# EAGLE board l-drv_h2-smd-001 (EAGLE 7.2.0)
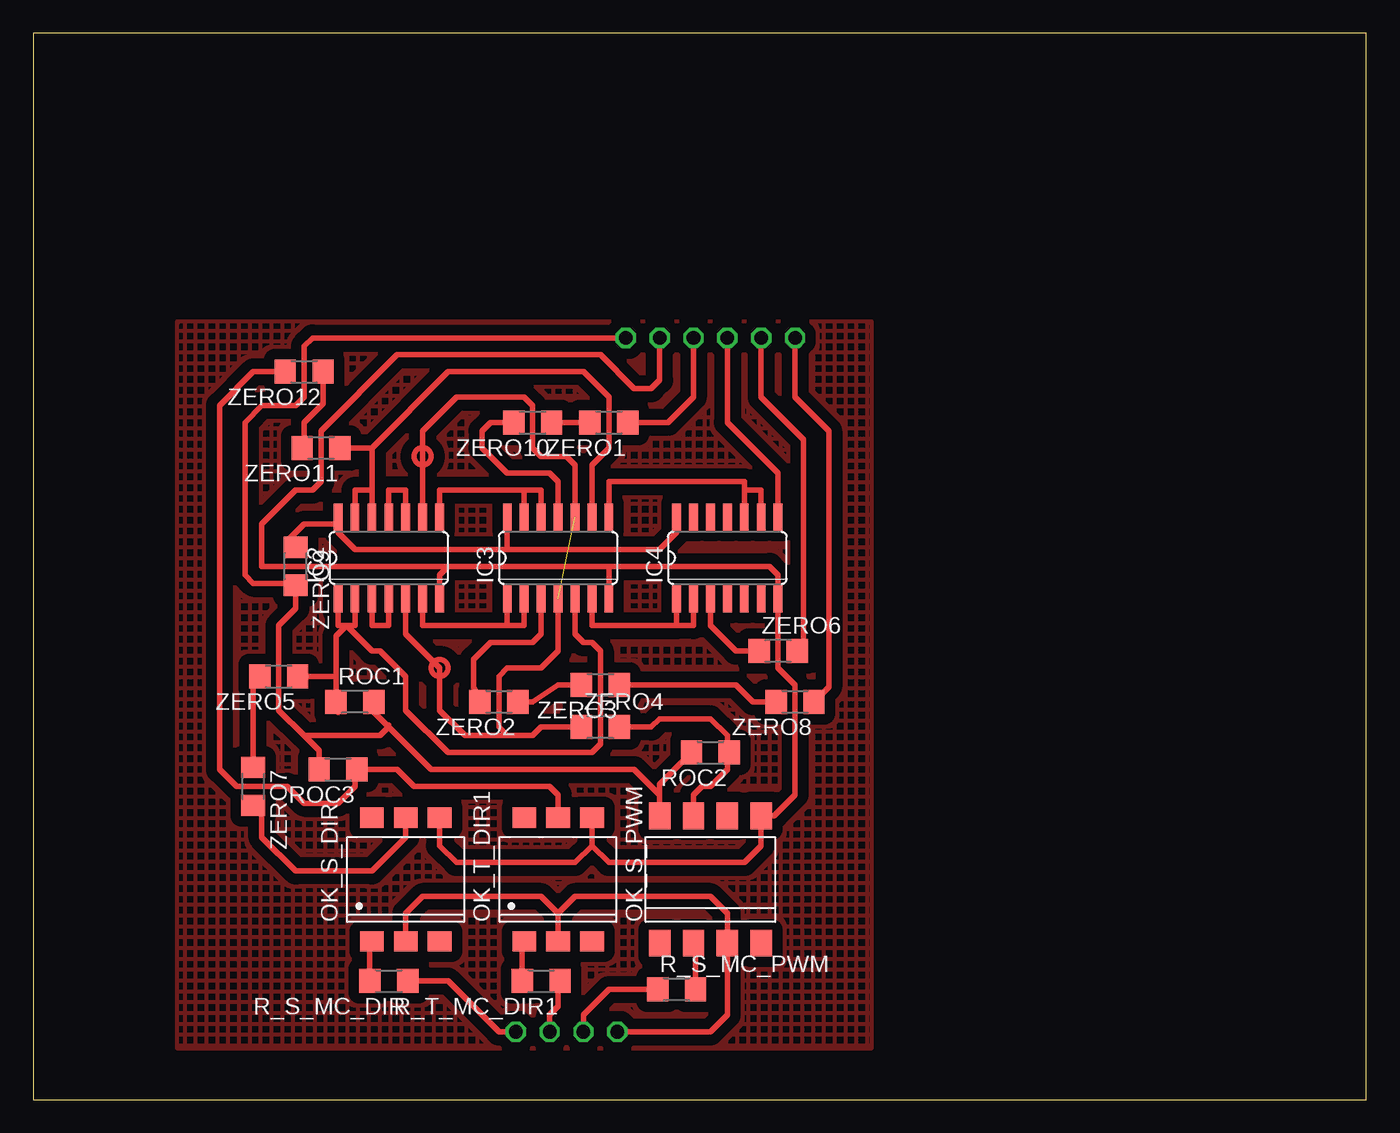
[diagram p0: board, top side]
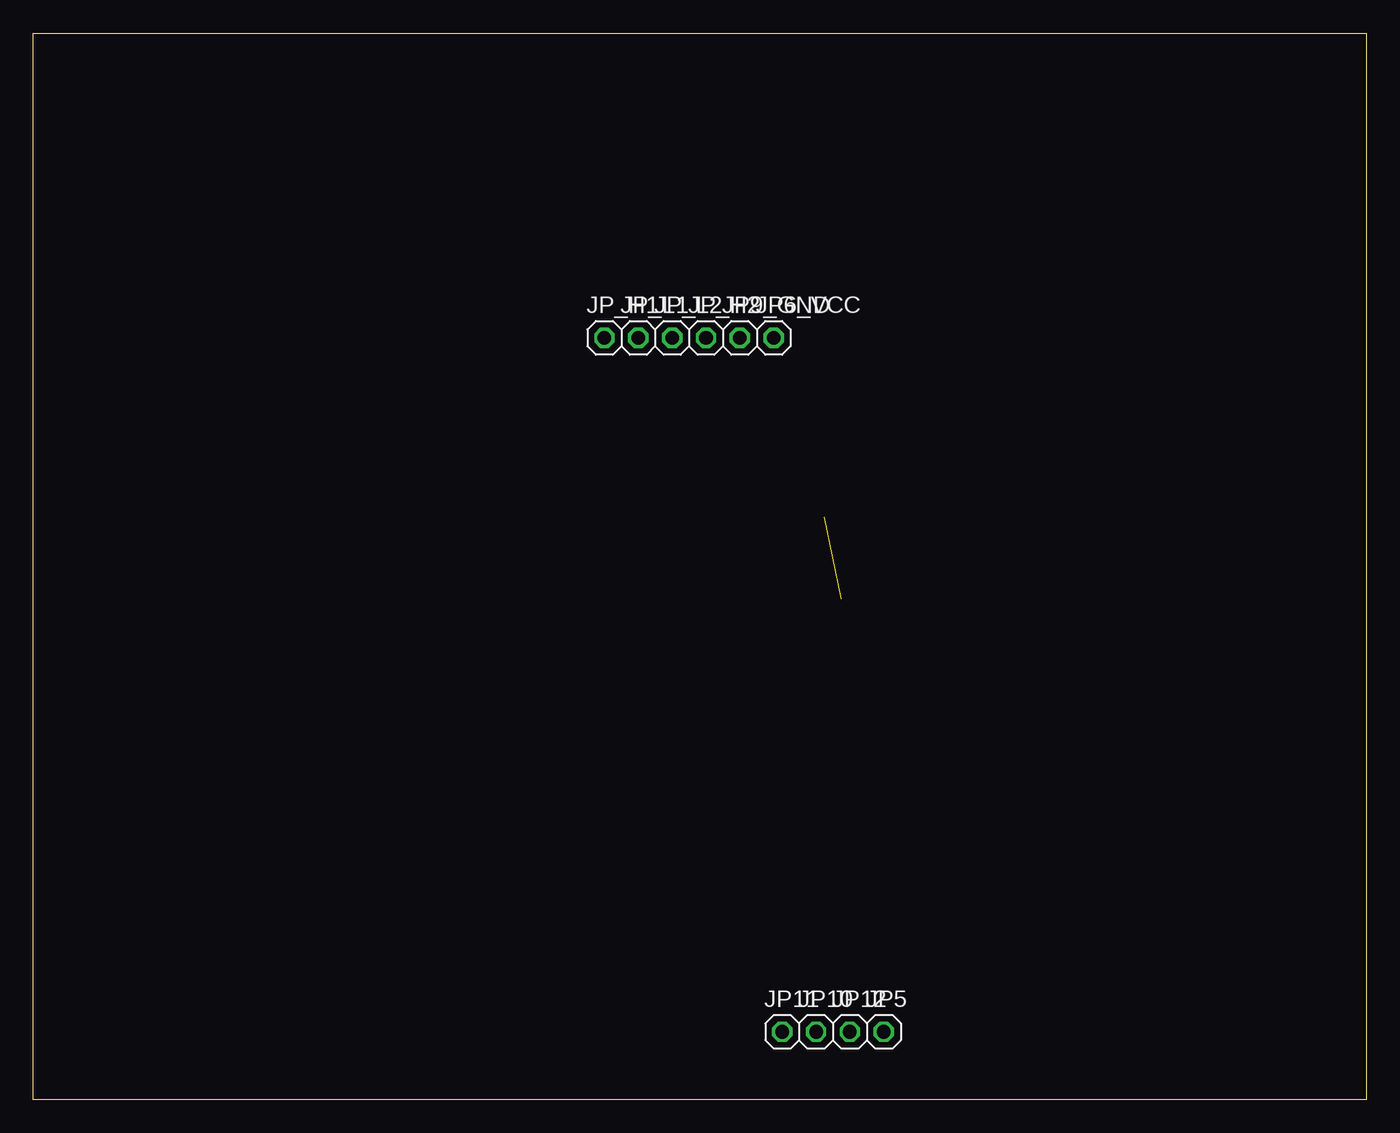
[diagram p1: board, bottom side, seen from below]

Size 100 x 80 mm. Coordinates in mm from the lower left corner, seen from the top.
Outline: 0,0 100,0 100,80 0,80 0,0
Copper layers (1*16): Top 0.035mm / dielectric 1.5mm / Bottom 0.035mm
Design rules "default": minimum track width 10mil, minimum drill 24mil, track to track 8mil, track to pad 8mil, pad to pad 8mil, via to via 8mil, smd to smd 8mil, copper to edge 40mil, drill to drill 8mil, minimum pad ring 10mil, minimum via ring 8mil, stop-mask expansion 4mil, vias tented up to drill 0mil, thermal gap 10mil

## Footprints (pad centres in the part's own frame; a part is rotated, then mirrored left to right if it is on the bottom)
SO14 = smd 0.66 x 2.032: 1 -3.81,-3.073; 2 -2.54,-3.073; 3 -1.27,-3.073; 4 0,-3.073; 5 1.27,-3.073; 6 2.54,-3.073; 7 3.81,-3.073; 8 3.81,3.073; 9 2.54,3.073; 10 1.27,3.073; 11 0,3.073; 12 -1.27,3.073; 13 -2.54,3.073; 14 -3.81,3.073
1X01 = drill 1.016 octagon: 1 0,0
DIL6-SMD = smd 1.78 x 1.52: 1 -2.54,-4.645; 2 0,-4.645; 3 2.54,-4.645; 4 2.54,4.645; 5 0,4.645; 6 -2.54,4.645
DIL8-SMD = smd 1.6 x 2: 1 -3.81,-4.77; 2 -1.27,-4.77; 3 1.27,-4.77; 4 3.81,-4.77; 5 3.81,4.77; 6 1.27,4.77; 7 -1.27,4.77; 8 -3.81,4.77
R1206 = smd 1.6 x 1.803: 1 -1.422,0; 2 1.422,0

## Placement (x,y rotation side)
IC2  74AC132D  [SO14]  26.67,40.64 0 top
IC3  74AC132D  [SO14]  39.37,40.64 0 top
IC4  74AC132D  [SO14]  52.07,40.64 0 top
JP5  [1X01]  36.2,5.08 0 bottom
JP6_VCC  [1X01]  44.45,57.15 0 bottom
JP9_GND  [1X01]  46.99,57.15 0 bottom
JP10  [1X01]  41.27,5.08 0 bottom
JP11  [1X01]  43.81,5.08 0 bottom
JP12  [1X01]  38.73,5.08 0 bottom
JP_H1  [1X01]  57.15,57.15 0 bottom
JP_H2  [1X01]  49.53,57.15 0 bottom
JP_L1  [1X01]  54.61,57.15 0 bottom
JP_L2  [1X01]  52.07,57.15 0 bottom
OK_S_DIR  4N25SM  [DIL6-SMD]  27.94,16.51 0 top
OK_S_PWM  6N137DIL8-SMD-6N137  [DIL8-SMD]  50.8,16.51 0 top
OK_T_DIR1  4N25SM  [DIL6-SMD]  39.37,16.51 0 top
R_S_MC_DIR  [R1206]  26.67,8.89 180 top
R_S_MC_PWM  [R1206]  48.26,8.26 0 top
R_T_MC_DIR1  [R1206]  38.1,8.89 180 top
ROC1  [R1206]  24.13,29.84 0 top
ROC2  [R1206]  50.8,26.04 180 top
ROC3  [R1206]  22.86,24.77 180 top
ZERO1  [R1206]  43.18,50.8 180 top
ZERO2  [R1206]  34.92,29.84 180 top
ZERO3  [R1206]  42.55,31.11 180 top
ZERO4  [R1206]  42.55,27.94 0 top
ZERO5  [R1206]  18.41,31.75 180 top
ZERO6  [R1206]  55.88,33.66 0 top
ZERO7  [R1206]  16.51,23.5 270 top
ZERO8  [R1206]  57.15,29.84 180 top
ZERO9  [R1206]  19.68,40.01 270 top
ZERO10  [R1206]  37.47,50.8 180 top
ZERO11  [R1206]  21.59,48.9 180 top
ZERO12  [R1206]  20.32,54.61 180 top

## Library data of the parts
IC2-IC4 = 74xx-eu
JP5 JP6_VCC JP9_GND JP10-JP12 JP_H1 JP_H2 JP_L1 JP_L2 = pinhead
OK_S_DIR OK_T_DIR1 = optocoupler; MF: FAIRCHILD SEMICONDUCTOR; MPN: 4N25SM; OC_FARNELL: 1021152; OC_NEWARK: 34C2020
OK_S_PWM = dbg-misc
R_S_MC_DIR R_S_MC_PWM R_T_MC_DIR1 ROC1-ROC3 ZERO1-ZERO12 = rcl

## Nets
GND: IC2.7 IC3.7 IC4.7 JP9_GND.1 OK_S_DIR.4 OK_S_PWM.5 OK_T_DIR1.4
MC_GND: JP11.1 OK_S_DIR.2 OK_S_PWM.3 OK_T_DIR1.2
N$1: OK_S_DIR.1 R_S_MC_DIR.2
N$2: OK_S_PWM.2 R_S_MC_PWM.2
N$3: OK_T_DIR1.1 R_T_MC_DIR1.2
N$4: IC3.3 ZERO2.2
N$5: IC2.3 IC2.4
N$6: JP5.1 R_S_MC_DIR.1
N$7: JP10.1 R_S_MC_PWM.1
N$8: JP12.1 R_T_MC_DIR1.1
N$9: IC2.10 IC2.11
N$10: ZERO1.2 ZERO10.1
N$11: IC2.6 IC3.1 IC3.2
N$12: IC2.8 IC3.12 IC3.13
N$13: JP_H2.1 ZERO1.1
N$14: JP_H1.1 ZERO8.1
N$15: IC3.11 ZERO10.2
N$16: ZERO2.1 ZERO3.2
N$17: IC4.3 ZERO6.1
N$18: IC4.8 JP_L2.1
N$19: IC3.6 IC4.1 IC4.2
N$20: OK_S_PWM.7 ROC2.1 ZERO4.2
N$21: IC3.8 IC4.9 IC4.10
N$22: ZERO5.2 ZERO7.1
N$23: JP_L1.1 ZERO6.2
N$24: OK_S_DIR.5 ZERO7.2
N$25: ZERO3.1 ZERO8.2
N$26: JP6_VCC.1 OK_S_PWM.8 ROC1.2 ROC2.2 ROC3.2 ZERO9.2
N$27: OK_T_DIR1.5 ROC3.1 ZERO12.2
N$28: ZERO11.2 ZERO12.1
N$D1: IC2.1 IC2.2 IC3.5 ROC1.1 ZERO5.1
N$D2: IC2.12 IC2.13 IC3.9 ZERO11.1
N$PWM: IC2.5 IC2.9 IC3.4 IC3.10 ZERO4.1
VCC: IC2.14 IC3.14 IC4.14 ZERO9.1

## Tracks (layer width: path | path; a pad name or v marks a point on that pad's centre or on a via)
GND
  Top 0.406: OK_S_DIR.4 30.48,19.05 31.75,17.78 40.64,17.78 41.91,19.05 | OK_T_DIR1.4 41.91,19.05 | 41.91,19.05 43.18,17.78 53.34,17.78 54.61,19.05 OK_S_PWM.5 55.57,21.28 57.15,22.86 57.15,31.11 55.88,32.38 IC4.7 55.88,39.37 55.24,40.01 43.18,40.01 | IC2.7 30.48,39.37 31.11,40.01 | 31.11,40.01 43.18,40.01 | IC3.7 43.18,40.01 | 31.11,40.01 17.14,40.01 17.14,43.18 19.68,45.72 20.95,45.72 21.59,46.35 21.59,50.16 27.3,55.88 42.55,55.88 45.09,53.34 46.35,53.34 46.99,53.98 JP9_GND.1
MC_GND
  Top 0.406: 39.37,13.97 40.64,15.24 50.8,15.24 52.07,13.97 OK_S_PWM.3 52.07,6.35 50.8,5.08 JP11.1 | OK_T_DIR1.2 39.37,13.97 | 39.37,13.97 38.1,15.24 29.21,15.24 27.94,13.97 OK_S_DIR.2
N$1
  Top 0.406: OK_S_DIR.1 25.25,11.87 R_S_MC_DIR.2
N$2
  Top 0.406: OK_S_PWM.2 49.68,11.74 R_S_MC_PWM.2
N$3
  Top 0.406: OK_T_DIR1.1 36.68,11.87 R_T_MC_DIR1.2
N$4
  Top 0.406: IC3.3 38.1,34.92 37.47,34.29 34.29,34.29 33.02,33.02 33.02,30.96 ZERO2.2
N$5
  Top 0.406: IC2.3 25.4,35.56 26.67,35.56 IC2.4
N$6
  Top 0.406: R_S_MC_DIR.1 31.11,8.89 34.92,5.08 JP5.1
N$7
  Top 0.406: JP10.1 41.27,6.35 43.18,8.26 R_S_MC_PWM.1
N$8
  Top 0.406: JP12.1 38.73,6.35 39.37,6.99 39.37,8.74 R_T_MC_DIR1.1
N$9
  Top 0.406: IC2.10 27.94,45.72 26.67,45.72 IC2.11
N$10
  Top 0.406: ZERO10.1 ZERO1.2
N$11
  Top 0.406: IC2.6 29.21,35.56 35.56,35.56 | 35.56,35.56 36.83,35.56 IC3.2 | IC3.1 35.56,35.56
N$12
  Top 0.406: IC3.13 36.83,45.72 | 36.83,45.72 38.1,45.72 IC3.12 | IC2.8 30.48,45.72 36.83,45.72
N$13
  Top 0.406: JP_H2.1 49.53,52.7 47.62,50.8 ZERO1.1
N$14
  Top 0.406: JP_H1.1 57.15,52.7 59.69,50.16 59.69,30.96 ZERO8.1
N$15
  Top 0.406: ZERO10.2 34.29,50.8 33.66,50.16 33.66,48.9 35.56,46.99 38.73,46.99 39.37,46.35 IC3.11
N$16
  Top 0.406: ZERO2.1 37.47,29.84 39.37,31.11 ZERO3.2
N$17
  Top 0.406: IC4.3 50.8,35.56 52.7,33.66 ZERO6.1
N$18
  Top 0.406: IC4.8 55.88,46.99 52.07,50.8 JP_L2.1
N$19
  Top 0.406: IC3.6 41.91,35.56 48.26,35.56 | 48.26,35.56 IC4.1 | IC4.2 49.53,35.56 48.26,35.56
N$20
  Top 0.406: OK_S_PWM.7 49.53,22.86 50.16,23.5 50.8,23.5 52.07,24.77 52.07,25.88 ROC2.1 52.07,26.19 52.07,27.3 50.8,28.57 46.99,28.57 46.35,27.94 ZERO4.2
N$21
  Top 0.406: IC3.8 43.18,46.35 53.34,46.35 53.34,45.72 | IC4.9 54.61,45.72 53.34,45.72 | IC4.10 53.34,45.72
N$22
  Top 0.406: ZERO7.1 16.51,31.27 ZERO5.2
N$23
  Top 0.406: JP_L1.1 54.61,52.7 57.78,49.53 57.78,34.14 ZERO6.2
N$24
  Top 0.406: OK_S_DIR.5 27.94,19.68 25.4,17.14 19.68,17.14 17.14,19.68 17.14,21.44 ZERO7.2
N$25
  Top 0.406: ZERO8.2 53.98,29.84 52.7,31.11 ZERO3.1
N$26
  Top 0.406: OK_S_PWM.8 46.99,22.86 | 46.99,22.86 45.09,24.77 29.84,24.77 26.67,27.94 | 46.99,22.86 46.99,23.65 ROC2.2 | 26.67,27.94 26.67,28.09 | 20.32,27.3 26.04,27.3 26.67,27.94 | 20.32,27.3 18.41,29.21 18.41,35.56 19.68,36.83 ZERO9.2 19.53,38.73 16.51,38.73 15.88,39.37 15.88,50.8 17.14,52.07 19.68,52.07 20.32,52.7 20.32,56.52 20.95,57.15 JP6_VCC.1 | ROC3.2 21.44,26.19 20.32,27.3 | ROC1.2 25.55,29.06 26.67,27.94
N$27
  Top 0.406: OK_T_DIR1.5 39.37,22.86 38.73,23.5 28.57,23.5 27.3,24.77 ROC3.1 24.13,24.61 24.13,23.5 22.86,22.23 20.32,22.23 19.05,23.5 15.24,23.5 13.97,24.77 13.97,52.07 16.51,54.61 ZERO12.2
N$28
  Top 0.406: ZERO12.1 21.74,52.22 20.32,50.8 20.32,49.05 ZERO11.2
N$29
  pour Top (isolate 0.813, hatched): 10.79,58.42 62.87,58.42 62.87,3.81 10.79,3.81
N$D1
  Top 0.406: IC2.1 22.86,35.56 23.5,35.56 | 23.5,35.56 24.13,35.56 IC2.2 | 22.71,31.75 22.71,34.77 23.5,35.56 | IC3.5 40.64,34.92 41.27,34.29 41.91,34.29 42.55,33.66 42.55,26.67 41.91,26.04 31.11,26.04 27.94,29.21 27.94,31.75 26.04,33.66 25.4,33.66 23.5,35.56 | 22.86,29.06 ROC1.1 22.71,31.75 | ZERO5.1 22.71,31.75
N$D2
  Top 0.406: IC2.13 24.13,45.72 25.4,45.72 | 25.4,45.72 IC2.12 | IC3.9 41.91,47.62 43.18,48.9 43.18,52.7 41.27,54.61 31.11,54.61 25.4,48.9 | 25.4,48.9 25.4,45.72 | 25.4,48.9 ZERO11.1
N$PWM  (1 unrouted)
  Top 0.406: IC2.5 27.94,34.92 30.48,32.38 30.48,29.21 32.38,27.3 35.56,27.3 | IC3.10 40.64,47.62 40.01,48.26 38.1,48.26 37.47,48.9 37.47,52.07 36.83,52.7 31.75,52.7 29.21,50.16 IC2.9 | 35.56,27.3 37.47,27.3 38.1,27.94 ZERO4.1 | 35.56,27.3 34.92,27.94 34.92,31.75 35.56,32.38 38.1,32.38 39.37,33.66 IC3.4
VCC
  Top 0.406: IC2.14 22.86,43.18 | 22.86,43.18 22.86,42.55 24.13,41.27 35.56,41.27 | 35.56,41.27 IC3.14 | 35.56,41.27 46.99,41.27 48.26,42.55 IC4.14 | 22.86,43.18 20.32,43.18 19.05,41.91 19.2,41.91 ZERO9.1
(copper drawn outside any net)
  shapes: Top circle x2